# Altium PCB BMS-TEMPSTRIP-LEFT-P00.PcbDoc
Units mm, origin at the board's own origin, x right, y up, seen from the top; angles counter-clockwise.
Board outline 10 x 286.53 mm, 2 copper layers (Bottom Layer, Top Layer), stack 0.533 mm thick; 16 components, 9 nets, 27 pads, 0 vias.
Unrouted connection lines stored in the file: 21.
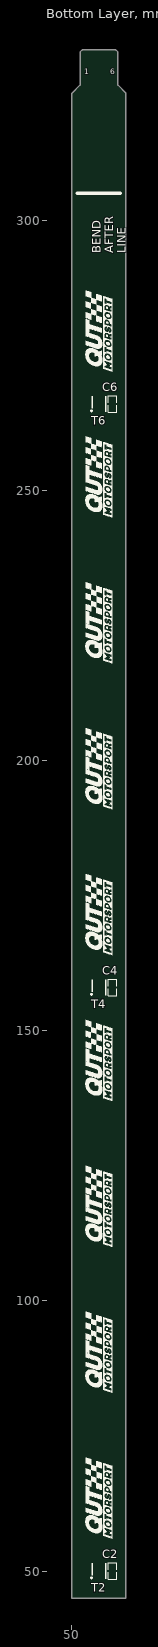
[diagram p0: Bottom Layer view]
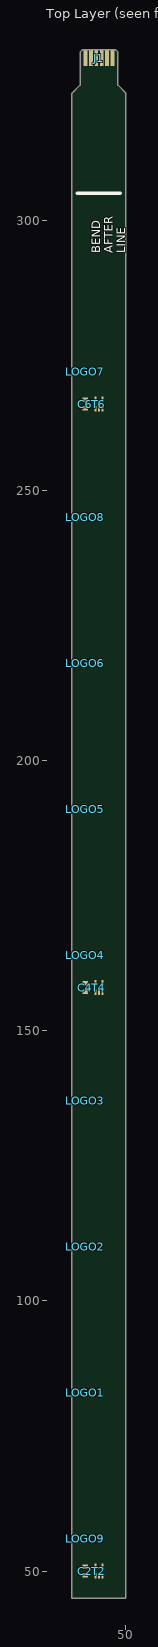
[diagram p1: Top Layer view, seen from below]

## Layer stack, top to bottom
Top Solder: solder mask 0.0102, Solder Resist, Dk 3.5
Bottom Layer: signal copper 0.0356
Dielectric 2: prepreg 0.0711, PP-006, Dk 4.1
Top Layer: signal copper 0.0356
Dielectric 3: prepreg 0.0711, PP-006, Dk 4.1
Dielectric 1: dielectric 0.32, FR-4, Dk 4.8
Bottom Solder: solder mask 0.0102, Solder Resist, Dk 3.5

## Board outline
50,45 50,323.528 51.5,325.028 51.5,331.128 51.9,331.528 58.1,331.528 58.5,331.128 58.5,325.028 60,323.528 60,45
board region "Layer Stack Region 1": 60,304.927 60,45 50,45 50,304.927
board region "Layer Stack Region 1": 50,304.927 50,323.528 51.5,325.028 51.5,331.128 51.9,331.528 58.1,331.528 58.5,331.128 58.5,325.028 60,323.528 60,304.927

## Design rules (kind name [scope] priority, off if disabled: settings)
Clearance [All] p1: gap=0.254 ignorepadtopadclearanceinfootprint=FALSE except(0: Arc-Hole Track-Hole SMDPad-Hole THPad-Hole Via-Hole Fill-Hole Poly-Hole Region-Hole Text-Hole)
FanoutControl Fanout_Default [All] p1: bgadir=Out bgaviamode=Centered fanoutstyle=Auto fanoutdirection=Alternating viagrid=0.025 // Fanout_Default (Default Rule)
FanoutControl Fanout_Small [(CompPinCount < 5)] p2: bgadir=Out bgaviamode=Centered fanoutstyle=Auto fanoutdirection=OutThenIn viagrid=0.025 // Fanout_Small (Default Rule)
FanoutControl Fanout_LCC [IsLCC] p4: bgadir=Out bgaviamode=Centered fanoutstyle=Auto fanoutdirection=Alternating viagrid=0.025 // Fanout_LCC (Default Rule)
FanoutControl Fanout_BGA [IsBGA] p5: bgadir=Out bgaviamode=Centered fanoutstyle=Auto fanoutdirection=Alternating viagrid=0.025 // Fanout_BGA (Default Rule)
PolygonConnect [All] p1: connectstyle=Relief reliefconductorwidth=0.254 reliefentries=4 polygonreliefangle="90 Angle" airgapwidth=0.254
RoutingVias [All] p1: holewidth=0.711 width=1.27 viastyle="Through Hole" minholewidth=0.711 minwidth=1.27 maxholewidth=0.711 maxwidth=1.27
SolderMaskExpansion [All] p1: expansion=0.102
Width [All] p1: maxlimit=0.254 minlimit=0.254 preferedwidth=0.254
26 further rules are at their usual default settings.

## Classes and differential pairs
component class BMS-TEMPSTRIP-S00: C2 C4 J1 LOGO1 LOGO3 LOGO4 LOGO6 LOGO7 LOGO8 LOGO9 T2 T4

## Components (designator, comment, footprint, x,y, rotation, side; value= is the part's Value field where it differs from the comment)
C2 "100nF" Cap_Ceramic_0603 57.5,50 r90 bottom
C4 "100nF" Cap_Ceramic_0603 57.5,158 r90 bottom
C6 "100nF" Cap_Ceramic_0603 57.5,266 r90 bottom
J1 "0526100672 FFC Insert End" "0526100672 FFC INSERT END" 55,330.028 r0 bottom
LOGO1 "15mm Wide QUTMS Logo" "QUTMS LOGO 15MM" 57.5,83 r90 bottom
LOGO2 "15mm Wide QUTMS Logo" "QUTMS LOGO 15MM" 57.5,110 r90 bottom
LOGO3 "15mm Wide QUTMS Logo" "QUTMS LOGO 15MM" 57.5,137 r90 bottom
LOGO4 "15mm Wide QUTMS Logo" "QUTMS LOGO 15MM" 57.5,164 r90 bottom
LOGO5 "15mm Wide QUTMS Logo" "QUTMS LOGO 15MM" 57.5,191 r90 bottom
LOGO6 "15mm Wide QUTMS Logo" "QUTMS LOGO 15MM" 57.5,218 r90 bottom
LOGO7 "15mm Wide QUTMS Logo" "QUTMS LOGO 15MM" 57.5,272 r90 bottom
LOGO8 "15mm Wide QUTMS Logo" "QUTMS LOGO 15MM" 57.5,245 r90 bottom
LOGO9 "15mm Wide QUTMS Logo" "QUTMS LOGO 15MM" 57.5,56 r90 bottom
T2 "TMP05AKSZ" "SC-70 (KS-5)" 55,50 r0 bottom
T4 "TMP05AKSZ" "SC-70 (KS-5)" 55,158 r0 bottom
T6 "TMP05AKSZ" "SC-70 (KS-5)" 55,266 r0 bottom

## Footprints (in the part's own frame and the unit in brackets; to place one, negate y for a bottom-side part, rotate by r counter-clockwise, add the part's x,y. Pads: shape width x height; smd on the part's side, far side on the other; paste and mask are expansions set on the pad)
"0526100672 FFC INSERT END" [mm]
  rect 0.7x3 smd: 1(-2.5,0) 2(-1.5,0) 3(-0.5,0) 4(0.5,0) 5(1.5,0) 6(2.5,0)
Cap_Ceramic_0603 [mil]
  rect 30x40 smd: 1(-31.24,0) 2(31.24,0)
  body extent -31,-16 31,16, height 33
"QUTMS LOGO 15MM" [mm]
"SC-70 (KS-5)" [mm]
  rect 0.45x1 smd: 1(-0.65,0.9) 2(0,0.9) 3(0.65,0.9) 4(0.65,-0.9) 5(-0.65,-0.9)
  body extent -0.98,-1.05 1.02,1.05, height 0.94

## Part data
C2 C4 C6: library part "100nF 50V 5% X7R 0603", "Capacitor, Ceramic, SMD, 100nF, 50V, 5%, X7R, 0603"
LOGO1 LOGO2 LOGO3 LOGO4 LOGO5 LOGO6 LOGO7 LOGO8 LOGO9: library part "QUTMS Logo 15mm"
T2 T4 T6: "Temperature Sensor, SMD, 3.3V, 2%, SOT-353"

## Nets (pads, with @x,y where several pads share a name; then routed paths per layer and width w, separated by ;. In a path a pad name is that pad's centre, name@x,y a point inside that pad or via, vN(x,y) a via of type N, cw(c..) or ccw(c..) an arc to the next point about the centre after c; other vN are vias at no path point)
3V3: C2.1 C4.1 C6.1 J1.1 T2.3 T2.5 T4.3 T4.5 T6.3 T6.5
"CHAIN A 1": 
"CHAIN A 2": 
"CHAIN A 3": 
"CHAIN B 1": T2.1 T4.2
"CHAIN B 2": T4.1 T6.2
GND: C2.2 C4.2 C6.2 J1.3 J1.5 J1.6 T2.4 T4.4 T6.4
"PWM OUT": J1.4 T6.1
SOC: J1.2 T2.2

## Silkscreen, mask and mechanical layers (free items; w line width, h text height)
Top Overlay:
  lines w0.6: 51,305 59,305
  text "BEND / AFTER / LINE" at 59.944,293.88 h1.52 r90
Bottom Overlay:
  lines w0.6: 51,305 59,305
  text "BEND / AFTER / LINE" at 50.165,293.88 h1.52 r270
Mechanical 1:
  lines w0.254: 51.5,325.028 50,323.528 50,45 60,45 60,323.528 58.5,325.028 ; 65,305 82.369,305 ; 65,316 85,316
  text "ASSEMBEY INSTRUCTIONS" at 65.659,316.992 h1.52
  text "Bend here" at 65.659,313.563 h1.52
  text "Bend before this point" at 65.913,302.641 h1.52
Stiffener:
  lines w0.254: 51.512,325.028 50.012,323.528 60.012,323.528 58.5,325.04
  text "Striffener" at 66.167,327.406 h1.52

## Text inside footprints (layer, text, board x,y; h text height)
J1: Top Overlay "1" at 52.282,327.056 h1.02; Top Overlay "6" at 57.041,327.056 h1.02